# EAGLE board combined (EAGLE 9.0.1)
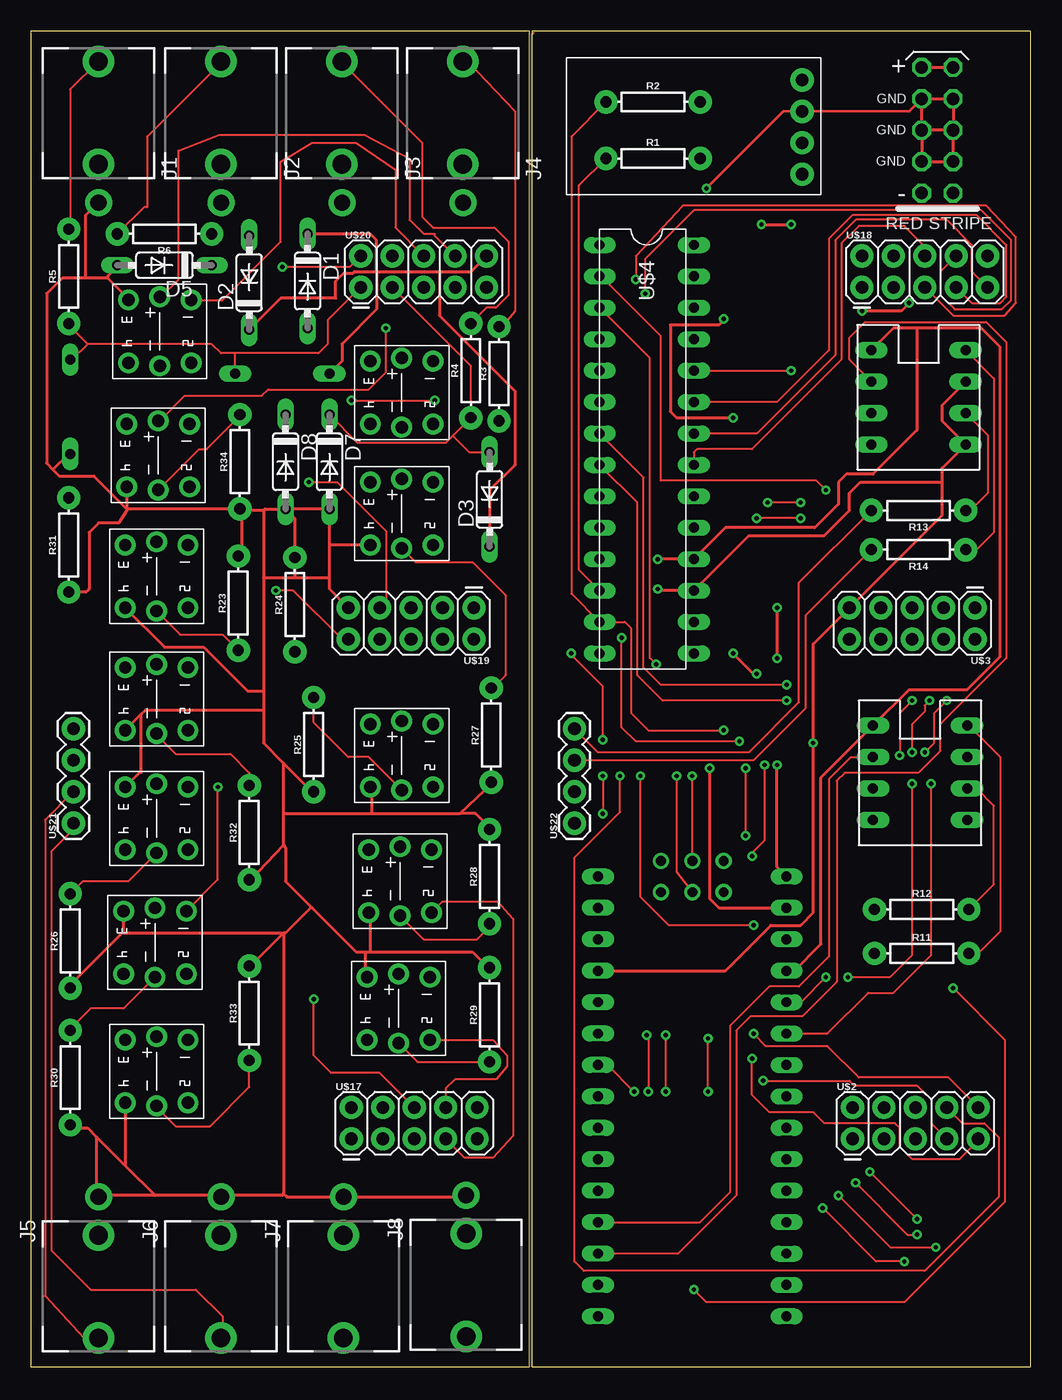
[diagram p0: board, top side]
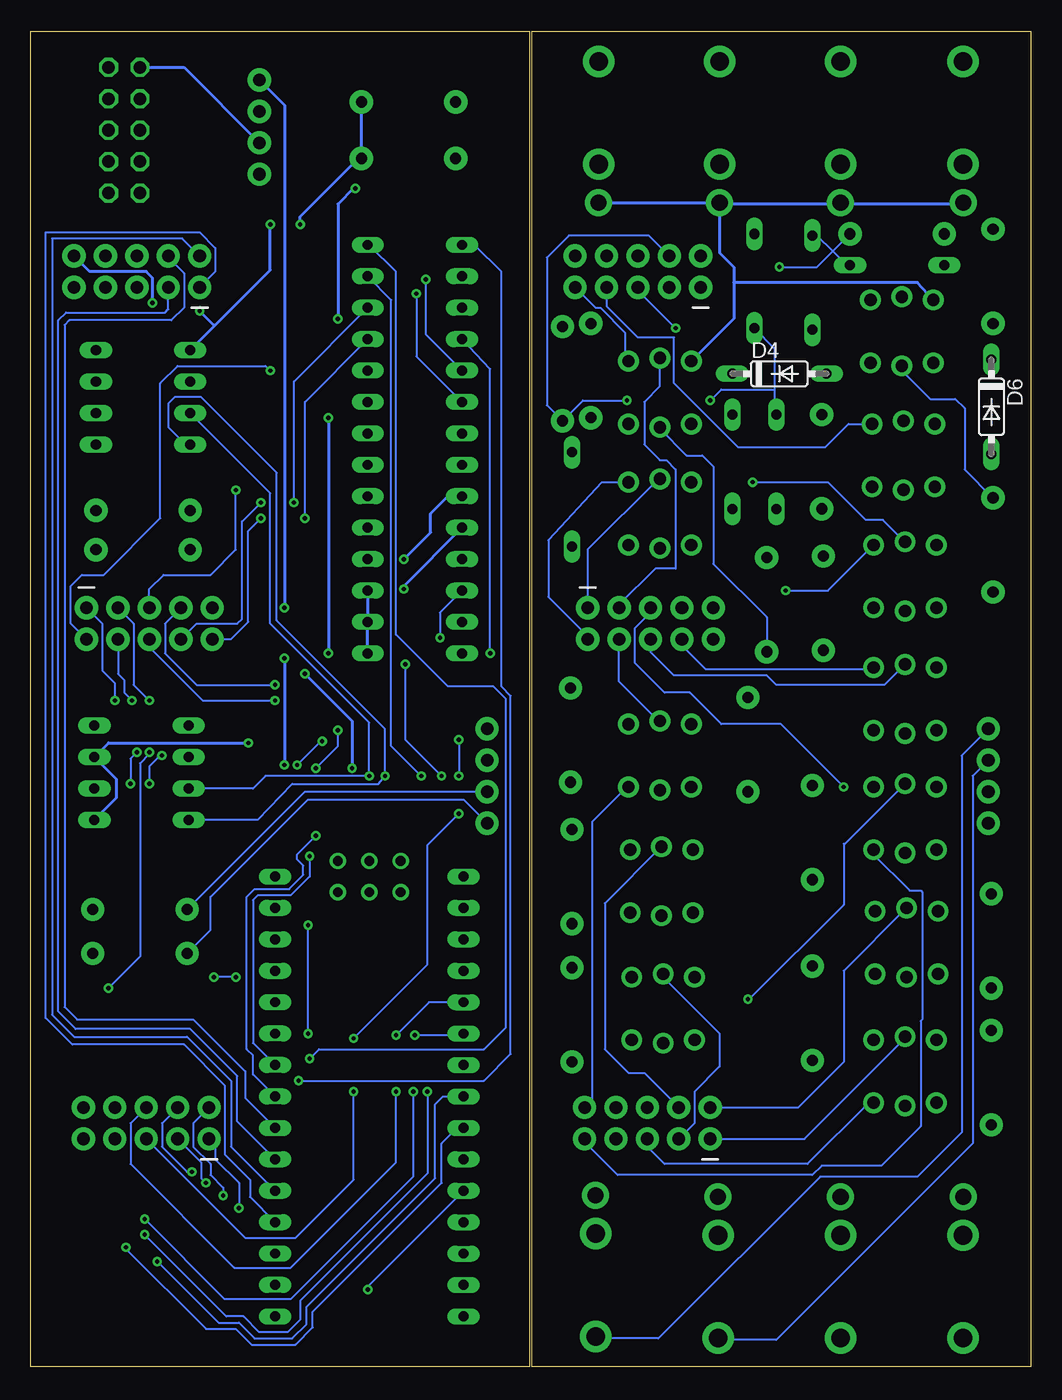
[diagram p1: board, bottom side, seen from below]

Size 80.82 x 107.94 mm. Coordinates in mm from the lower left corner, seen from the top.
Outline: 0,0 40.31,0 40.31,107.94 0,107.94 0,0
Outline: 40.51,0 80.82,0 80.82,107.94 40.51,107.94 40.51,0
Copper layers (1*16): Top 0.035mm / dielectric 1.5mm / Bottom 0.035mm
Design rules "default": minimum track width 6mil, minimum drill 0.35mm, track to track 6mil, track to pad 6mil, pad to pad 6mil, via to via 6mil, smd to smd 6mil, copper to edge 40mil, drill to drill 6mil, minimum pad ring 10mil, minimum via ring 8mil, stop-mask expansion 4mil, vias tented up to drill 0mil, thermal gap 10mil
Net classes: 1 power: width 0.61 mm; 2 ground: width 0.61 mm

## Footprints (pad centres in the part's own frame; a part is rotated, then mirrored left to right if it is on the bottom)
DO35-7 = drill 0.813 long: A 3.81,0; C -3.81,0
8PIN = drill 0.813 long: 1 -7.62,-3.81; 2 -5.08,-3.81; 3 -2.54,-3.81; 4 0,-3.81; 11 0,3.81; 12 -2.54,3.81; 13 -5.08,3.81; 14 -7.62,3.81
THONK35A = drill 1.3 pad 2.184: 1 0,-6.48 | drill 1.5 pad 2.54: 2 0,-3.38; 3 0,4.92
MA05-2 = drill 1.016 octagon: 1 -5.08,-1.27; 2 -5.08,1.27; 3 -2.54,-1.27; 4 -2.54,1.27; 5 0,-1.27; 6 0,1.27; 7 2.54,-1.27; 8 2.54,1.27; 9 5.08,-1.27; 10 5.08,1.27
AXIAL-0.3 = drill 0.9 pad 1.88: P$1 -3.81,0; P$2 3.81,0
NANO = drill 0.8 long: 3.3V -10.16,24.13; 5V -10.16,-1.27; A0 -10.16,19.05; A1 -10.16,16.51; A2 -10.16,13.97; A3 -10.16,11.43; A4 -10.16,8.89; A5 -10.16,6.35; A6 -10.16,3.81; A7 -10.16,1.27; AREF -10.16,21.59; D2 5.08,1.27; D3 5.08,3.81; D4 5.08,6.35; D5 5.08,8.89; D6 5.08,11.43; D7 5.08,13.97; D8 5.08,16.51; D9 5.08,19.05; D10 5.08,21.59; D11 5.08,24.13; D12 5.08,26.67; D13 -10.16,26.67; GND -10.16,-6.35; GND1 5.08,-1.27; RAW -10.16,-8.89; RST -10.16,-3.81; RST1 5.08,-3.81; RX1 5.08,-6.35; TX0 5.08,-8.89 | drill 0.8: ICSP1 -5.08,-10.16; ICSP2 -5.08,-7.62; ICSP3 -2.54,-10.16; ICSP4 -2.54,-7.62; ICSP5 0,-10.16; ICSP6 0,-7.62
2X5 = drill 1.016 pad 1.88: 1 0,0; 2 0,2.54; 3 2.54,0; 4 2.54,2.54; 5 5.08,0; 6 5.08,2.54; 7 7.62,0; 8 7.62,2.54; 9 10.16,0; 10 10.16,2.54
DIP28 = drill 0.8 long: P$1 0,0; P$2 2.54,0; P$3 5.08,0; P$4 7.62,0; P$5 10.16,0; P$6 12.7,0; P$7 15.24,0; P$8 17.78,0; P$9 20.32,0; P$10 22.86,0; P$11 25.4,0; P$12 27.94,0; P$13 30.48,0; P$14 33.02,0; P$15 0,7.62; P$16 2.54,7.62; P$17 5.08,7.62; P$18 7.62,7.62; P$19 10.16,7.62; P$20 12.7,7.62; P$21 15.24,7.62; P$22 17.78,7.62; P$23 20.32,7.62; P$24 22.86,7.62; P$25 25.4,7.62; P$26 27.94,7.62; P$27 30.48,7.62; P$28 33.02,7.62
PB6149L = drill 1 pad 1.676: P$1 2.54,2.54; P$2 0,2.794; P$3 -2.54,2.54; P$4 -2.54,-2.54; P$5 0,-2.794; P$6 2.54,-2.54
1X04 = drill 1.016 pad 1.88: 1 0,0; 2 2.54,0; 3 5.08,0; 4 7.62,0

## Placement (x,y rotation side)
D1  1N4148DO35-7  [DO35-7]  22.35,87.76 270 top
D2  1N4148DO35-7  [DO35-7]  17.65,87.63 90 top
D3  1N4148DO35-7  [DO35-7]  37.08,70.1 90 top
D4  1N4148DO35-7  [DO35-7]  20.32,80.26 0 bottom
D5  1N4148DO35-7  [DO35-7]  10.79,89.03 180 top
D6  1N4148DO35-7  [DO35-7]  3.17,77.6 270 bottom
D7  1N4148DO35-7  [DO35-7]  24.13,73.15 270 top
D8  1N4148DO35-7  [DO35-7]  20.57,73.15 270 top
E$1  [8PIN]  71.75,74.55 270 top
E$2  [8PIN]  71.88,44.2 270 top
J1  [THONK35A]  5.46,100.58 0 top
J2  [THONK35A]  15.37,100.58 0 top
J3  [THONK35A]  25.15,100.58 0 top
J4  [THONK35A]  34.92,100.58 0 top
J5  [THONK35A]  5.46,7.24 180 top
J6  [THONK35A]  15.37,7.24 180 top
J7  [THONK35A]  25.27,7.24 180 top
J8  [THONK35A]  35.18,7.37 180 top
POWER  [MA05-2]  73.28,99.95 90 top
R1  100  [AXIAL-0.3]  50.29,97.66 0 top
R2  100  [AXIAL-0.3]  50.29,102.23 0 top
R3  10  [AXIAL-0.3]  37.85,80.26 90 top
R4  10  [AXIAL-0.3]  35.56,80.52 90 top
R5  10  [AXIAL-0.3]  3.05,88.14 90 top
R6  10  [AXIAL-0.3]  10.79,91.57 180 top
R11  100  [AXIAL-0.3]  72.01,33.4 0 top
R12  100  [AXIAL-0.3]  72.01,36.96 0 top
R13  100  [AXIAL-0.3]  71.75,69.22 180 top
R14  100  [AXIAL-0.3]  71.75,66.04 180 top
R23  1k  [AXIAL-0.3]  16.76,61.72 90 top
R24  1k  [AXIAL-0.3]  21.34,61.59 90 top
R25  1k  [AXIAL-0.3]  22.86,50.29 90 top
R26  1k  [AXIAL-0.3]  3.17,34.42 90 top
R27  1k  [AXIAL-0.3]  37.21,51.05 90 top
R28  1k  [AXIAL-0.3]  37.08,39.62 90 top
R29  1k  [AXIAL-0.3]  37.08,28.45 90 top
R30  1k  [AXIAL-0.3]  3.17,23.37 90 top
R31  1k  [AXIAL-0.3]  3.05,66.42 90 top
R32  1k  [AXIAL-0.3]  17.65,43.18 90 top
R33  1k  [AXIAL-0.3]  17.65,28.57 90 top
R34  1k  [AXIAL-0.3]  16.89,73.15 90 top
U$1  NANO  [NANO]  50.93,30.73 180 top
U$2  2X5PEG  [2X5]  66.42,18.41 0 top
U$3  2X5PEG  [2X5]  76.33,61.34 180 top
U$4  [DIP28]  45.97,90.68 270 top
U$5  PB6149L  [PB6149L]  10.16,53.98 0 top
U$6  PB6149L  [PB6149L]  10.03,34.29 0 top
U$7  PB6149L  [PB6149L]  29.72,28.96 0 top
U$8  PB6149L  [PB6149L]  29.97,49.4 0 top
U$9  PB6149L  [PB6149L]  29.97,68.96 0 top
U$10  PB6149L  [PB6149L]  29.97,78.74 0 top
U$11  PB6149L  [PB6149L]  10.29,73.66 0 top
U$12  PB6149L  [PB6149L]  10.16,63.88 0 top
U$13  PB6149L  [PB6149L]  10.16,44.32 0 top
U$14  PB6149L  [PB6149L]  10.16,23.88 0 top
U$15  PB6149L  [PB6149L]  10.41,83.69 0 top
U$16  PB6149L  [PB6149L]  29.84,39.24 0 top
U$17  2X5PEG  [2X5]  25.91,18.41 0 top
U$18  2X5PEG  [2X5]  67.18,87.25 0 top
U$19  2X5PEG  [2X5]  35.81,61.34 180 top
U$20  2X5PEG  [2X5]  26.67,87.25 0 top
U$21  1X4PEG  [1X04]  3.43,43.94 90 top
U$22  1X4PEG  [1X04]  43.94,43.94 90 top
U$23  DROKMINIVREGULATOR  [1X04]  62.36,96.39 90 top

## Library data of the parts
D1-D8 = diode
E$1 E$2 = mcp4922DIP
J1-J8 = nw2s; OC_FARNELL: unknown; OC_NEWARK: unknown
POWER = TomW; OC_FARNELL: unknown; OC_NEWARK: unknown
R1 R2 R11-R14 = SparkFun-Resistors; PROD_ID: RES-12181
R3-R6 = SparkFun-Resistors; PROD_ID: RES-12180
R23-R34 = SparkFun-Resistors; PROD_ID: RES-12182
U$1 = Arduino-clone
U$2 U$3 U$5-U$22 = LP10A1A
U$4 = IO-Expanders; MCP23017-ESP: DIP
U$23 = DROKMINIVREGULATOR

## Nets
N$1: R13.P$2 U$22.4
N$2: R11.P$2
N$3: J5.3
N$4: E$2.12 R12.P$2
N$5: R14.P$2 U$22.3
N$13: D4.A D6.C R5.P$1 U$20.1
N$22: D1.C D2.C D3.C D4.C U$20.10
N$23: J6.3
N$27: J7.3
N$30: J8.3
S$1: U$14.P$2 U$17.1
S$2: U$6.P$2 U$17.2
S$3: R5.P$2
S$4: U$20.9
S$5: E$2.14
S$6: D2.A D5.C R6.P$1 U$20.2
S$7: R6.P$2
S$8: D1.A D8.C R3.P$1 U$20.4
S$9: E$1.12 R13.P$1
S$10: E$1.14 R14.P$1
S$11: R3.P$2
S$12: R4.P$2
S$13 [ground]: POWER.3 POWER.4 POWER.5 POWER.6 POWER.7 POWER.8 U$23.3
S$14: E$2.2 U$1.D9
S$15: E$1.2 U$1.D10
S$16: D3.A R4.P$1 U$20.3
S$17: U$7.P$6 U$17.8
S$18: R12.P$1 U$22.2
S$19: R11.P$1 U$22.1
S$20: R34.P$2 U$11.P$5
S$21: R32.P$2 U$5.P$5
S$22: R23.P$1 U$12.P$5
S$23: R31.P$2 U$15.P$5
S$24: U$9.P$5
S$25: R24.P$1 U$10.P$5
S$26: E$1.3 E$2.3 U$1.ICSP3
S$27: E$1.4 E$2.4 U$1.ICSP4
S$28: R28.P$1 U$16.P$5
S$29: R29.P$1 U$7.P$5
S$30: U$1.A0 U$18.1
S$31: U$1.A1 U$18.2
S$32: U$10.P$3 U$15.P$3
S$33: R25.P$2 U$8.P$5
S$34: R26.P$2 U$13.P$5
S$35: R30.P$2 U$6.P$5
S$36: R33.P$1 U$14.P$5
S$37: U$21.1
S$38: U$1.A2 U$18.3
S$39: D6.A R23.P$2 R24.P$2 R26.P$1 R31.P$1 R33.P$2 R34.P$1 U$5.P$4 U$6.P$3 U$9.P$4 U$11.P$4 U$12.P$4 U$13.P$3 U$14.P$4 U$19.9
S$40: U$21.2
S$41: U$21.3
S$42: U$21.4
S$43: U$7.P$2 U$17.3
S$44: U$16.P$2 U$17.4
S$45: U$8.P$2 U$19.4
S$46: U$13.P$2 U$17.6
S$47: U$5.P$2 U$19.6
S$48: U$9.P$2 U$19.1
S$49: U$10.P$2 U$19.3
S$50: U$14.P$6 U$17.5
S$51: U$16.P$6 U$17.7
S$52: U$13.P$6 U$17.9
S$53: U$8.P$6 U$17.10
S$54: U$5.P$1 U$19.8
S$55: U$12.P$2 U$19.7
S$56: U$12.P$1 U$19.10
S$57: U$6.P$1 U$19.5
S$58: U$1.A3
S$59: POWER.9 POWER.10 U$23.2
S$60: U$1.RAW U$23.4
S$61: U$11.P$1 U$20.7
S$62: U$9.P$1 U$19.2
S$63: U$20.6
S$64: U$15.P$2 U$20.8
S$65: U$11.P$2 U$20.5
S$66: U$4.P$22 U$18.6
S$67: U$4.P$21 U$18.9
S$68: U$4.P$20 U$18.7
S$69: U$3.2 U$4.P$19
S$70: U$3.10 U$4.P$18
S$71: U$3.8 U$4.P$17
S$72: U$2.10 U$4.P$16
S$73: E$1.11 E$1.13 E$2.11 E$2.13 U$1.GND1 U$3.9 U$4.P$10 U$4.P$26 U$4.P$27 U$4.P$28
S$74: U$2.7 U$4.P$1
S$75: U$3.5 U$4.P$2
S$76: U$2.8 U$4.P$3
S$77: U$2.5 U$4.P$4
S$78: U$4.P$5 U$18.5
S$79: U$4.P$6 U$18.8
S$80: U$3.7 U$4.P$7
S$81: U$3.6 U$4.P$8
S$82: R1.P$1 U$1.A5 U$4.P$12
S$83: R2.P$1 U$1.A4 U$4.P$13
S$84: U$1.A6 U$3.1
S$85: U$1.A7 U$3.3
S$86: U$1.D8 U$3.4
S$87: U$4.P$15
S$88: U$1.D2 U$2.6
S$89: U$1.D3 U$2.4
S$90: U$1.D4 U$2.3
S$91: U$1.D5 U$2.1
S$92: U$1.D6 U$2.2
S$93: U$1.GND
S$94: E$1.1 E$2.1 R1.P$2 R2.P$2 U$1.5V U$4.P$9 U$4.P$25 U$18.10

## Tracks (layer width: path | path; a pad name or v marks a point on that pad's centre or on a via)
N$1
  Top 0.152: R13.P$2 62.1,63.37 62.1,53.72 58.04,49.66 45.85,49.66 U$22.4
N$4
  Top 0.152: R12.P$2 77.85,38.99 77.85,45.34 76.45,46.74 E$2.12
N$5
  Top 0.152: R14.P$2 62.61,60.71 62.61,53.21 58.42,49.02 U$22.3
N$13
  Top 0.152: U$20.1 24,84.58 24,82.68 23.24,81.92 16.51,81.92 | 16.51,81.92 15.37,81.92 14.61,82.68 4.57,82.68 | R5.P$1 3.05,84.2 4.57,82.68 | D4.A 16.51,81.92 | D6.C 3.3,81.41 4.57,82.68
N$22
  Top 0.152: 37.08,66.42 D3.C | 17.78,83.82 D2.C
  Top 0.254: 27.94,88.52 26.16,88.52 26.04,88.39 25.27,88.39 24.64,87.76 24.64,86.36 20.19,86.36 D2.C | 27.94,88.52 33.02,88.52 | 33.02,88.52 35.56,88.52 U$20.10 | 27.94,88.52 27.94,85.47 25.15,82.68 25.15,81.28 D4.C | 33.02,88.52 33.02,84.96 39.12,78.87 39.12,72.9 37.08,70.87 D3.C | D1.C 27.43,91.57 27.94,91.06 27.94,88.52
S$1
  Bottom 0.152: U$17.1 18.29,18.41 10.16,26.54 U$14.P$2
S$2
  Bottom 0.152: U$6.P$2 15.11,32 15.11,24.64 18.8,20.95 U$17.2
S$3
  Top 0.152: R5.P$2 3.17,92.08 3.17,103.25 5.46,105.54
S$4
  Bottom 0.152: U$20.9 35.18,85.6 34.8,85.6 32.77,83.57 32.77,81.28
S$5
  Top 0.152: 75.95,33.4 76.58,33.4 78.36,35.18 78.36,49.28 75.82,51.82 E$2.14
S$6  (via drill 0.35)
  Top 0.152: U$20.2 25.78,88.9 v20.32,88.9
  Bottom 0.152: v20.32,88.9 17.27,88.9 16,90.17 | 16,90.17 R6.P$1 | D5.C 14.86,89.03 16,90.17 | D2.A 17.27,91.44 16,90.17
S$7
  Top 0.152: 15.62,105.66 9.4,99.44 9.4,93.73 9.14,93.73 R6.P$2
S$8  (via drill 0.35)
  Top 0.152: v25.91,78.11 v32.64,78.11
  Bottom 0.152: v25.91,78.11 25.02,78.99 20.7,78.99 | 20.7,78.99 20.7,77.09 D8.C | D1.A 20.7,82.3 20.7,78.99 | U$20.4 30.86,91.44 37.34,91.44 39.12,89.66 39.12,77.72 R3.P$1 36.2,78.11 v32.64,78.11
S$9
  Top 0.152: E$1.12 77.34,75.31 77.34,70.61 75.95,69.22 R13.P$1
S$10
  Top 0.152: E$1.14 77.85,79.88 77.85,67.44 76.45,66.04 R14.P$1
S$11
  Top 0.152: 35.31,105.54 39.12,101.47 39.12,85.34 38.1,84.07 R3.P$2
S$12
  Top 0.152: 25.15,105.54 25.15,105.41 31.62,98.93 31.62,92.96 32.51,92.08 37.47,92.08 38.61,90.93 38.61,86.61 37.59,85.6 36.83,85.6 R4.P$2
S$13  (via drill 0.35)
  Top 0.203: 70.99,101.47 U$23.3 60.83,101.47
  Top 0.254: POWER.8 70.99,101.47 | POWER.6 POWER.8 | POWER.8 POWER.7 POWER.5 | POWER.5 POWER.6 | POWER.6 POWER.4 POWER.3 POWER.5 | 60.83,101.47 v54.61,95.25
S$14
  Top 0.152: U$1.D9 54.1,11.68 56.52,14.1 56.52,27.56 59.69,30.73 62.1,30.73 64.52,33.15 64.52,47.5 66.29,49.28 E$2.2
S$15
  Top 0.152: U$1.D10 52.32,9.14 57.02,13.84 57.02,27.18 58.17,28.32 62.36,28.32 65.15,31.11 65.15,47.37 65.79,48.01 71.75,48.01 73.53,49.78 73.53,51.94 78.87,57.28 78.87,82.8 77.22,84.45 67.44,84.45 66.17,83.19 66.17,81.41 E$1.2
S$16
  Top 0.152: D3.A 35.43,73.91 34.16,75.18 34.16,75.31 | 34.16,75.31 R4.P$1 35.56,80.9 U$20.3 | 34.16,75.31 33.53,74.68 26.42,74.68 24.13,76.96
S$17
  Top 0.152: U$7.P$6 37.34,26.42 38.48,25.15 38.48,24.26 37.59,23.24 34.29,23.24 33.53,22.48 U$17.8
S$18
  Bottom 0.152: R12.P$1 58.67,46.48 U$22.2
S$19
  Bottom 0.152: R11.P$1 66.29,35.31 66.29,37.97 58.42,45.85 45.85,45.85 U$22.1
S$20
  Top 0.152: U$11.P$5 13.59,74.17 14.22,74.17 16.89,76.83 R34.P$2
S$21
  Top 0.152: U$5.P$5 10.16,51.05 11.68,49.53 16.13,49.53 17.65,48.01 R32.P$2
S$22
  Top 0.152: U$12.P$5 12.06,59.18 15.49,59.18 R23.P$1
S$23
  Bottom 0.152: R31.P$2 5.33,72.52 5.33,77.47 6.1,78.23 8.13,78.23 10.41,80.52 U$15.P$5
S$24
  Top 0.152: U$9.P$5 31.11,65.02 35.69,65.02 38.35,62.36 38.35,55.88 37.21,54.74
S$25
  Bottom 0.152: U$10.P$5 29.97,75.82 27.81,73.66 26.54,73.66 25.65,72.77 25.65,64.9 21.34,60.58 R24.P$1
S$26  (via drill 0.35)
  Top 0.152: U$1.ICSP3 v53.47,47.75
  Bottom 0.152: E$2.3 62.87,46.74 61.85,47.75 v53.47,47.75 53.47,52.07 61.47,60.07 61.47,70.61 E$1.3
S$27  (via drill 0.35)
  Top 0.152: v52.2,47.75 52.2,40.01 U$1.ICSP4
  Bottom 0.152: E$2.4 62.48,44.2 59.69,47.12 52.7,47.12 v52.2,47.75 52.2,51.56 60.96,60.33 60.96,72.26 67.06,78.36 69.22,78.36 69.72,77.85 69.72,75.95 68.33,74.55 E$1.4
S$28
  Top 0.152: U$16.P$5 31.75,34.54 36.07,34.54 37.08,35.56 R28.P$1
S$29
  Top 0.152: U$7.P$5 31.24,24.64 R29.P$1
S$30
  Bottom 0.152: U$18.1 65.91,88.52 65.91,90.42 67.18,91.69 79.63,91.69 79.63,28.19 77.47,26.04 68.45,26.04 65.15,22.73 65.15,17.14 63.12,15.11 63.12,13.72 U$1.A0
S$31
  Bottom 0.152: U$18.2 68.58,91.19 79.12,91.19 79.12,28.45 77.34,26.67 68.2,26.67 64.64,23.11 64.64,17.78 U$1.A1
S$32
  Bottom 0.152: 25.15,93.98 25.27,93.98 | 25.27,93.98 25.4,93.98 | 25.4,94.11 25.27,93.98
  Bottom 0.254: 35.18,94.11 25.4,94.11 | U$10.P$3 24,84.71 24,87.63 | 24,87.63 24,88.9 25.15,90.04 25.15,93.98 5.59,93.98 | U$15.P$3 9.14,87.63 24,87.63
S$33
  Top 0.152: R25.P$2 22.86,52.07 25.65,49.28 27.3,49.28 U$8.P$5
S$34
  Top 0.152: R26.P$2 4.19,39.24 7.87,39.24 U$13.P$5
S$35
  Top 0.152: U$6.P$5 7.49,28.96 4.83,28.96 3.17,27.3 R30.P$2
S$36
  Top 0.152: R33.P$1 17.65,22.61 14.48,19.43 11.68,19.43 10.16,20.95 U$14.P$5
S$37
  Top 0.152: 15.49,2.29 15.49,4.06 13.34,6.22 4.83,6.22 1.65,9.4 1.65,41.66 3.43,43.43 U$21.1
S$38
  Bottom 0.152: U$1.A2 64.14,19.81 64.14,23.5 67.94,27.3 77.22,27.3 78.61,28.7 78.61,84.58 77.98,85.22 69.98,85.22 69.72,85.47 U$18.3
S$39
  Top 0.152: 7.37,35.05 7.49,35.05 | 37.21,32 37.34,32 | 22.61,37.08 22.73,37.08 | 27.05,33.4 27.18,33.53 | 27.56,44.83 27.69,44.7 | 8.89,48.01 8.76,48.01 | 6.22,88.01 6.22,88.14 6.1,88.01 | 7.75,69.34 7.75,69.22 | 35.31,13.72 35.43,13.84 | 20.45,13.97 20.45,14.1 | 17.78,32.38 R33.P$2
  Top 0.254: 7.37,35.05 3.17,30.86 R26.P$1 | U$6.P$3 7.49,35.05 20.45,35.05 | 24.13,63.75 24.13,62.87 U$19.9 | 24.13,63.75 24.13,66.42 | 24.13,66.42 24.13,69.34 20.57,69.34 | U$9.P$4 24.13,66.42 | 20.45,42.16 17.65,39.24 | 37.21,32 35.69,33.53 27.43,33.53 | 27.43,33.53 27.18,33.53 26.29,33.53 22.73,37.08 20.57,39.24 20.57,41.91 20.45,42.16 | 27.05,31.5 27.05,33.4 | 27.43,36.7 27.43,33.53 | 20.45,44.7 27.69,44.7 34.67,44.7 | 34.67,44.7 37.34,47.24 | 37.08,43.56 35.94,44.7 34.67,44.7 | 27.56,46.99 27.56,44.83 | 20.45,42.16 20.45,44.7 | 18.8,69.22 18.8,63.75 | 18.8,63.75 18.8,54.61 | 18.8,54.61 18.8,53.09 | 18.8,53.09 18.8,50.42 20.45,48.77 | 22.86,46.35 20.45,48.77 | 18.8,54.61 17.53,54.61 13.97,58.17 10.79,58.17 U$12.P$4 | U$5.P$4 8.89,52.7 | 8.89,52.7 9.27,53.09 18.8,53.09 | 8.89,52.7 8.89,48.01 | 20.45,44.7 20.45,48.77 | 8.76,48.01 U$13.P$3 | 18.8,69.22 17.02,69.22 | 8,86.23 6.22,88.01 | 6.22,88.14 6.99,88.9 | 5.46,94.11 4.45,93.09 4.45,88.01 | 6.1,88.01 4.45,88.01 | 4.45,88.01 2.54,88.01 1.27,86.74 1.27,73.03 1.78,72.52 | 1.78,72.52 2.29,72.01 5.08,72.01 7.75,69.34 | U$11.P$4 7.75,69.34 | 7.75,69.22 7.11,68.2 5.46,68.2 4.7,67.44 4.7,62.87 4.45,62.61 R31.P$1 | 7.75,69.34 R34.P$1 17.02,69.22 | R23.P$2 17.02,65.79 17.02,69.22 | 18.8,69.22 18.92,69.34 20.57,69.34 | 20.57,69.34 21.34,68.58 R24.P$2 21.34,63.75 | 35.31,13.72 20.7,13.72 20.45,13.97 | 20.45,35.05 20.45,14.1 20.32,13.84 10.03,13.84 | 3.3,19.3 4.57,19.3 5.33,18.54 | 5.33,18.54 7.62,16.26 | U$14.P$4 7.62,16.26 | 7.62,16.26 10.03,13.84 | 10.03,13.84 5.33,13.84 5.33,18.54 | 22.61,37.08 20.57,35.05 20.45,35.05 | 20.45,35.05 17.78,32.38 | 24.13,63.75 21.34,63.75 | 21.34,63.75 18.8,63.75
  Top 0.254: 1.78,72.52 3.05,73.79 D6.A
S$40
  Top 0.152: 5.59,2.29 4.32,2.29 1.14,5.71 1.14,44.2 U$21.2
S$41
  Bottom 0.152: U$21.3 4.7,47.75 4.7,18.03 20.57,2.16 25.4,2.16
S$42
  Bottom 0.152: 35.31,2.29 30.1,2.29 17.02,15.37 9.14,15.37 5.59,18.92 5.59,49.4 U$21.4
S$43
  Bottom 0.152: U$17.3 27.18,19.68 27.18,22.23 25.15,24.26 25.15,26.92 29.72,31.5 U$7.P$2
S$44
  Bottom 0.152: U$16.P$2 34.42,37.47 34.42,25.65 32.51,23.75 31.24,23.75 U$17.4
S$45
  Bottom 0.152: U$19.4 33.27,55.37 30.1,52.2 U$8.P$2
S$46  (via drill 0.35)
  Top 0.152: v22.86,29.72 22.86,25.15 24.26,23.75 28.19,23.75 U$17.6
  Bottom 0.152: 22.99,29.72 v22.86,29.72 22.73,29.72 15.11,37.34 15.11,42.29 14.99,42.29 U$13.P$2
S$47
  Bottom 0.152: U$5.P$2 11.81,55.12 20.57,55.12 21.34,55.88 28.83,55.88 30.73,57.78 U$19.6
S$48
  Bottom 0.152: U$9.P$2 30.1,71.75 35.81,66.04 U$19.1
S$49
  Bottom 0.152: U$10.P$2 29.97,79.25 31.24,77.98 31.24,74.55 29.97,73.28 29.46,73.28 28.7,72.52 28.7,64.52 30.35,64.52 33.27,61.59 U$19.3
S$50
  Bottom 0.152: U$17.5 30.99,17.78 29.59,16.38 18.03,16.38 13.08,21.34 U$14.P$6
S$51
  Top 0.152: U$17.7 35.05,16.89 37.34,16.89 38.99,18.67 38.99,36.2 37.72,37.59 33.27,37.59 U$16.P$6
S$52
  Bottom 0.152: U$17.9 36.07,18.16 33.4,15.49 17.65,15.49 16.89,16.26 12.06,16.26 8.89,19.43 8.89,27.94 8.76,28.07 8.76,38.35 8.89,38.48 9.78,38.48 12.7,41.4 U$13.P$6
S$53
  Bottom 0.152: U$8.P$6 32.64,46.86 35.43,44.07 35.43,21.59 U$17.10
S$54
  Bottom 0.152: U$19.8 28.19,58.29 26.29,56.39 12.83,56.39 U$5.P$1
S$55  (via drill 0.35)
  Top 0.152: v22.48,71.5 24.77,71.5 28.7,67.56 28.7,61.85 U$19.7
  Bottom 0.152: U$12.P$2 11.94,68.45 13.34,68.45 16.38,71.5 v22.48,71.5
S$56  (via drill 0.35)
  Top 0.152: v19.81,62.74 21.21,62.74 25.15,58.8 U$19.10
  Bottom 0.152: v19.81,62.74 16.38,62.74 U$12.P$1
S$57  (via drill 0.35)
  Top 0.152: v15.11,46.86 15.11,39.37 U$6.P$1
  Bottom 0.152: v15.11,46.86 20.19,51.94 25.02,51.94 27.56,54.48 29.59,54.48 32,56.9 32,59.69 30.73,60.96 U$19.5
S$58
  Bottom 0.152: 69.72,89.66 68.45,88.39 68.45,85.6 69.47,84.58 77.72,84.58 78.11,84.2 78.11,29.08 77.09,28.07 67.69,28.07 63.5,23.88 63.5,21.72 U$1.A3
S$59
  Top 0.254: POWER.10 POWER.9
  Bottom 0.254: POWER.10 68.45,105.03 U$23.2
S$60  (via drill 0.35)
  Top 0.254: v60.33,61.34 v60.33,57.28 | U$1.RAW 60.33,40.39 v60.33,48.64
  Bottom 0.254: U$23.4 60.33,101.98 v60.33,61.34 | v60.33,57.28 v60.33,48.64
S$61
  Bottom 0.152: U$20.7 34.29,85.72 31.75,83.19 28.83,83.19 28.83,79.5 23.62,74.3 16.64,74.3 14.73,76.2 U$11.P$1
S$62
  Bottom 0.152: U$9.P$1 34.67,71.5 38.99,66.8 38.99,62.23 35.81,59.05 U$19.2
S$63
  Top 0.152: 13.08,86.23 15.49,86.23 20.19,90.93 20.19,97.41 22.73,98.93 26.29,98.93 29.46,96.77 29.46,92.08 U$20.6
S$64
  Top 0.152: U$20.8 32.64,91.44 32.64,91.57 31.75,91.57 30.61,92.71 30.61,97.66 26.92,99.57 15.24,99.57 11.94,98.3 11.94,87.88 10.54,86.49 U$15.P$2
S$65  (via drill 0.35)
  Top 0.152: v28.7,83.95 28.7,80.39 27.3,78.99 19.18,78.99 18.67,78.49 12.45,78.49 10.41,76.45 U$11.P$2
  Bottom 0.152: U$20.5 31.75,87 v28.7,83.95
S$66
  Top 0.152: U$18.6 72.26,90.55 70.61,92.2 66.93,92.2 65.53,90.81 65.53,81.41 58.29,74.17 53.85,74.17 53.59,73.91 U$4.P$22
S$67
  Top 0.152: U$18.9 76.07,88.52 76.07,90.68 74.04,92.71 66.67,92.71 65.02,91.06 65.02,81.79 58.67,75.44 U$4.P$21
S$68
  Top 0.152: U$18.7 76.07,85.98 78.36,85.98 78.87,86.49 78.87,90.68 76.45,93.09 66.42,93.09 64.52,91.19 64.52,82.17 60.33,77.98 U$4.P$20
S$69  (via drill 0.35)
  Top 0.152: U$4.P$19 v61.47,80.52
  Bottom 0.152: U$3.2 77.6,60.07 77.6,63.12 76.71,64.01 74.93,64.01 70.36,68.58 70.36,79.5 68.96,80.9 61.85,80.9 v61.47,80.52
S$70  (via drill 0.35)
  Top 0.152: v62.23,68.58 v58.67,68.58
  Bottom 0.152: U$3.10 64.64,58.8 63.25,60.2 63.25,67.56 v62.23,68.58 | v58.67,68.58 58.67,77.98 U$4.P$18
S$71  (via drill 0.35)
  Top 0.152: v62.23,69.85 v59.56,69.85
  Bottom 0.152: v62.23,69.85 63.75,68.33 63.75,60.45 64.14,60.07 67.44,60.07 U$3.8 | v59.56,69.85 59.56,79.63 U$4.P$17
S$72  (via drill 0.35)
  Top 0.152: U$2.10 74.17,23.37 66.93,23.37 64.39,25.91 59.44,25.91 v58.42,26.92 | v58.42,35.69 51.56,35.69 49.28,37.97 v49.28,47.75
  Bottom 0.152: v58.42,26.92 v58.42,35.69 | v49.28,47.75 51.69,50.16 51.69,86.23 U$4.P$16
S$73  (via drill 0.35)
  Top 0.254: U$1.GND1 56.13,32 59.82,35.69 62.23,35.69 63.25,36.7 v63.25,50.42 63.25,58.42 U$3.9 73.66,68.83 73.66,71.5 | 73.66,71.5 73.66,72.64 E$1.11 73.66,76.45 73.66,77.72 E$1.13 | 73.66,71.5 67.06,71.5 66.17,70.61 66.17,69.22 64.14,67.18 58.04,67.18 U$4.P$26 50.8,62.74 v50.67,62.87
  Bottom 0.254: v63.25,50.42 74.55,50.42 E$2.13 73.91,47.5 73.91,45.97 E$2.11 | U$4.P$28 U$4.P$27 U$4.P$26 | v50.67,62.87 50.67,63.12 U$4.P$10
S$74  (via drill 0.35)
  Top 0.152: v59.18,23.11 66.17,23.11 66.55,22.73 71.63,22.73 72.77,21.59 72.77,19.68 U$2.7
  Bottom 0.152: v59.18,23.11 44.2,23.11 42.04,25.27 42.04,54.23 42.8,54.99 42.8,88.52 44.96,90.68 U$4.P$1
S$75  (via drill 0.35)
  Top 0.152: v64.26,70.87 63.5,71.63 50.93,71.63 50.93,83.31 46.1,88.14 U$4.P$2
  Bottom 0.152: U$3.5 71.25,62.87 70.1,64.01 66.29,64.01 64.26,66.04 v64.26,70.87
S$76  (via drill 0.35)
  Top 0.152: v47.62,47.75 47.62,44.83 43.94,41.15 43.94,8.51 44.7,7.75 72.26,7.75 78.23,13.72 78.23,18.54 77.09,19.68 75.31,19.68 U$2.8 | U$4.P$3 50.04,81.53 50.04,57.28 v50.55,56.77
  Bottom 0.152: v47.62,47.75 50.55,50.67 v50.55,56.77
S$77  (via drill 0.35)
  Top 0.152: v46.23,47.75 v46.23,44.7 | v54.74,22.23 v54.74,26.54 | v46.23,50.67 46.23,54.99 43.69,57.53 v43.69,57.66
  Bottom 0.152: U$2.5 63.5,10.41 59.44,10.41 54.74,15.11 v54.74,22.23 | v46.23,50.67 v46.23,47.75 | v54.74,26.54 48.77,32.51 48.77,42.16 v46.23,44.7 | v43.69,57.66 43.69,80.64 U$4.P$4
S$78  (via drill 0.35)
  Top 0.152: U$18.5 74.55,84.96 78.74,84.96 79.63,85.98 79.63,91.31 77.22,93.85 52.7,93.85 48.9,89.79 v48.9,87.88
  Bottom 0.152: U$4.P$5 48.9,83.44 v48.9,87.88
S$79  (via drill 0.35)
  Top 0.152: U$18.8 73.53,88.52 73.53,86.61 74.68,85.47 78.49,85.47 79.25,86.23 79.25,91.06 76.83,93.47 53.59,93.47 49.66,89.53 v49.66,86.74
  Bottom 0.152: U$4.P$6 49.66,81.66 v49.66,86.74
S$80  (via drill 0.35)
  Top 0.152: v61.09,55.12 50.93,55.12 49.53,56.52 49.53,71.88 U$4.P$7
  Bottom 0.152: U$3.7 69.98,60.07 69.98,57.66 67.44,55.12 v61.09,55.12
S$81  (via drill 0.35)
  Top 0.152: v61.09,53.85 51.05,53.85 49.02,55.88 49.02,69.85 U$4.P$8
  Bottom 0.152: U$3.6 71.25,58.17 66.93,53.85 v61.09,53.85
S$82  (via drill 0.35)
  Top 0.152: v59.31,48.64 59.31,42.55 58.29,41.53 v58.29,41.27 | v57.28,50.55 48.9,50.55 47.75,51.69 v47.75,58.93 | R1.P$1 44.32,95.5 44.32,64.39 U$4.P$12
  Bottom 0.152: v58.29,41.27 58.29,39.62 59.82,38.1 62.48,38.1 62.87,37.72 62.87,26.16 U$1.A5 | v59.31,48.64 57.4,50.55 v57.28,50.55 | U$4.P$12 47.75,60.96 v47.75,58.93
S$83  (via drill 0.35)
  Top 0.152: v57.78,42.93 v57.78,48.39 | R2.P$1 43.69,99.44 43.69,62.48 U$4.P$13 48.01,60.2 48.51,59.69 48.51,52.83 49.91,51.44 v56.01,51.44
  Bottom 0.152: v57.78,42.93 59.31,41.4 59.31,41.02 58.8,40.51 58.8,39.75 59.94,38.61 62.74,38.61 63.37,37.97 63.37,25.65 62.87,25.15 62.87,23.62 U$1.A4 | v57.78,48.39 56.01,50.16 v56.01,51.44
S$84  (via drill 0.35)
  Top 0.152: v74.04,53.85 73.03,52.83 73.03,50.42 v72.26,49.66 | U$1.A6 64.39,26.92 67.69,30.23 69.72,30.23 72.77,33.27 v72.77,47.12
  Bottom 0.152: U$3.1 75.06,60.07 75.06,56.26 74.04,55.24 v74.04,53.85 | v72.26,49.66 72.77,49.15 v72.77,47.12
S$85  (via drill 0.35)
  Top 0.152: v71.25,53.85 70.23,52.83 v70.23,49.4 | U$1.A7 62.23,29.46 v64.26,31.5 | v66.04,31.5 69.47,31.5 71.25,33.27 v71.25,47.12
  Bottom 0.152: U$3.3 72.52,60.07 72.52,55.12 v71.25,53.85 | v71.25,47.12 71.25,48.51 70.36,49.4 v70.23,49.4 | v64.26,31.5 v66.04,31.5
S$86  (via drill 0.35)
  Top 0.152: v71.25,49.66 71.25,51.94 72.26,52.96 72.26,53.47 v72.64,53.85 | v74.55,30.61 78.74,26.42 78.74,13.34 70.61,5.21 54.61,5.21 v53.59,6.22
  Bottom 0.152: U$3.4 73.79,56.01 73.28,55.5 73.28,54.48 v72.64,53.85 | v71.25,49.66 71.25,49.53 72.01,48.77 72.01,33.15 v74.55,30.61 | U$1.D8 53.59,6.48 v53.59,6.22
S$87  (via drill 0.35)
  Top 0.152: 76.71,18.41 75.06,16.76 71.25,16.76 70.23,17.78 70.23,19.3 69.85,19.68 64.14,19.68 63.25,20.57 59.69,20.57 58.29,21.97 v58.29,24.89
  Bottom 0.152: v58.29,24.89 57.53,25.65 44.2,25.65 42.42,27.43 42.42,53.98 43.43,54.99 47.12,54.99 51.31,59.18 51.31,88.52 53.47,90.68 U$4.P$15
S$88  (via drill 0.35)
  Top 0.152: v51.31,26.8 v51.31,22.23
  Bottom 0.152: U$1.D2 48.64,29.46 v51.31,26.8 | v51.31,22.23 51.31,16.51 59.82,8 64.39,8 72.77,16.38 72.77,19.68 U$2.6
S$89  (via drill 0.35)
  Top 0.152: v71.63,11.94 v67.82,15.75 | v49.78,26.8 49.91,26.67 v49.91,22.23
  Bottom 0.152: U$2.4 70.23,19.68 70.23,17.78 68.2,15.75 v67.82,15.75 | U$1.D3 45.97,26.8 v49.78,26.8 | v49.91,22.23 49.91,15.37 59.82,5.46 65.15,5.46 v71.63,11.94
S$90  (via drill 0.35)
  Top 0.152: U$1.D4 46.61,24.38 v48.77,22.23 | v66.67,14.86 70.87,10.67 v71.63,10.67
  Bottom 0.152: U$2.3 67.06,16.51 67.06,15.24 v66.67,14.86 | v48.77,22.23 48.77,15.62 59.05,5.33 59.05,3.81 60.07,2.79 62.36,2.79 63.63,4.06 65.02,4.06 v71.63,10.67
S$91  (via drill 0.35)
  Top 0.152: v70.61,8.51 68.33,8.51 v64.01,12.83
  Bottom 0.152: U$2.1 65.91,17.91 65.91,16.76 64.01,14.86 v64.01,12.83 | v70.61,8.51 65.66,3.56 64.01,3.56 62.74,2.29 59.69,2.29 58.55,3.43 58.55,4.83 48.13,15.24 48.13,21.21 47.5,21.84 U$1.D5
S$92  (via drill 0.35)
  Top 0.152: v65.28,13.84 69.47,9.65 v73.15,9.65
  Bottom 0.152: U$1.D6 46.35,19.3 47.62,18.03 47.62,14.86 58.04,4.45 58.04,3.17 59.44,1.78 62.99,1.78 64.26,3.05 66.67,3.05 73.15,9.53 v73.15,9.65 | U$2.2 67.69,19.68 67.69,17.78 66.29,16.38 66.29,15.49 65.28,14.48 v65.28,13.84
S$93  (via drill 0.35)
  Top 0.254: v56.77,76.71 52.2,76.71 51.69,77.22 51.69,84.2 55.63,84.2 56.01,84.58 v56.01,84.71 | v56.77,57.66 58.42,56.01 v58.67,56.01 | v54.86,48.39 54.86,37.85 55.63,37.08 U$1.GND
  Bottom 0.254: v56.77,76.71 v56.77,57.66 | 54.74,95.25 56.01,93.98 v56.01,84.71 | v58.67,56.01 54.86,52.2 v54.86,48.39
S$94  (via drill 0.35)
  Top 0.254: U$1.5V 61.72,32 63.88,34.16 63.88,47.62 E$2.1 70.99,54.74 75.69,54.74 78.36,57.4 78.36,82.42 76.83,83.95 71.63,83.95 | 71.63,83.95 69.72,83.95 E$1.1 | 71.63,83.95 71.63,75.69 68.07,72.14 65.91,72.14 65.28,71.5 65.28,69.72 63.37,67.82 56.13,67.82 U$4.P$25 v50.67,65.28 | v59.05,92.33 v61.47,92.33 | v70.99,85.98 70.36,85.34 v67.18,85.34
  Bottom 0.152: 65.91,84.2 66.04,84.2
  Bottom 0.254: U$4.P$9 47.12,70.36 48.51,68.96 48.51,67.44 v50.67,65.28 | v59.05,92.33 59.05,92.96 54.36,97.66 R1.P$2 R2.P$2 | E$1.1 65.91,84.2 61.47,88.65 v61.47,92.33 | 66.04,84.2 v67.18,85.34 | v70.99,85.98 70.99,88.01 71.5,88.52 76.07,88.52 U$18.10
S$95
  Top 0.152: 40.51,0 40.51,107.7 40.64,107.82
S$104
  Top 0.152: 68.2,62.61 69.22,62.61